# Altium PCB Stm32_design_Project.PcbDoc
Units mm, origin at the board's own origin, x right, y up, seen from the top; angles counter-clockwise.
Board outline 152.4 x 101.6 mm, 4 copper layers (L1 (Sig), L2 (GND), L3 (GND), L4 Sig), stack 1.57 mm thick; 84 components, 49 nets, 282 pads, 95 vias.
Unrouted connection lines stored in the file: 17.
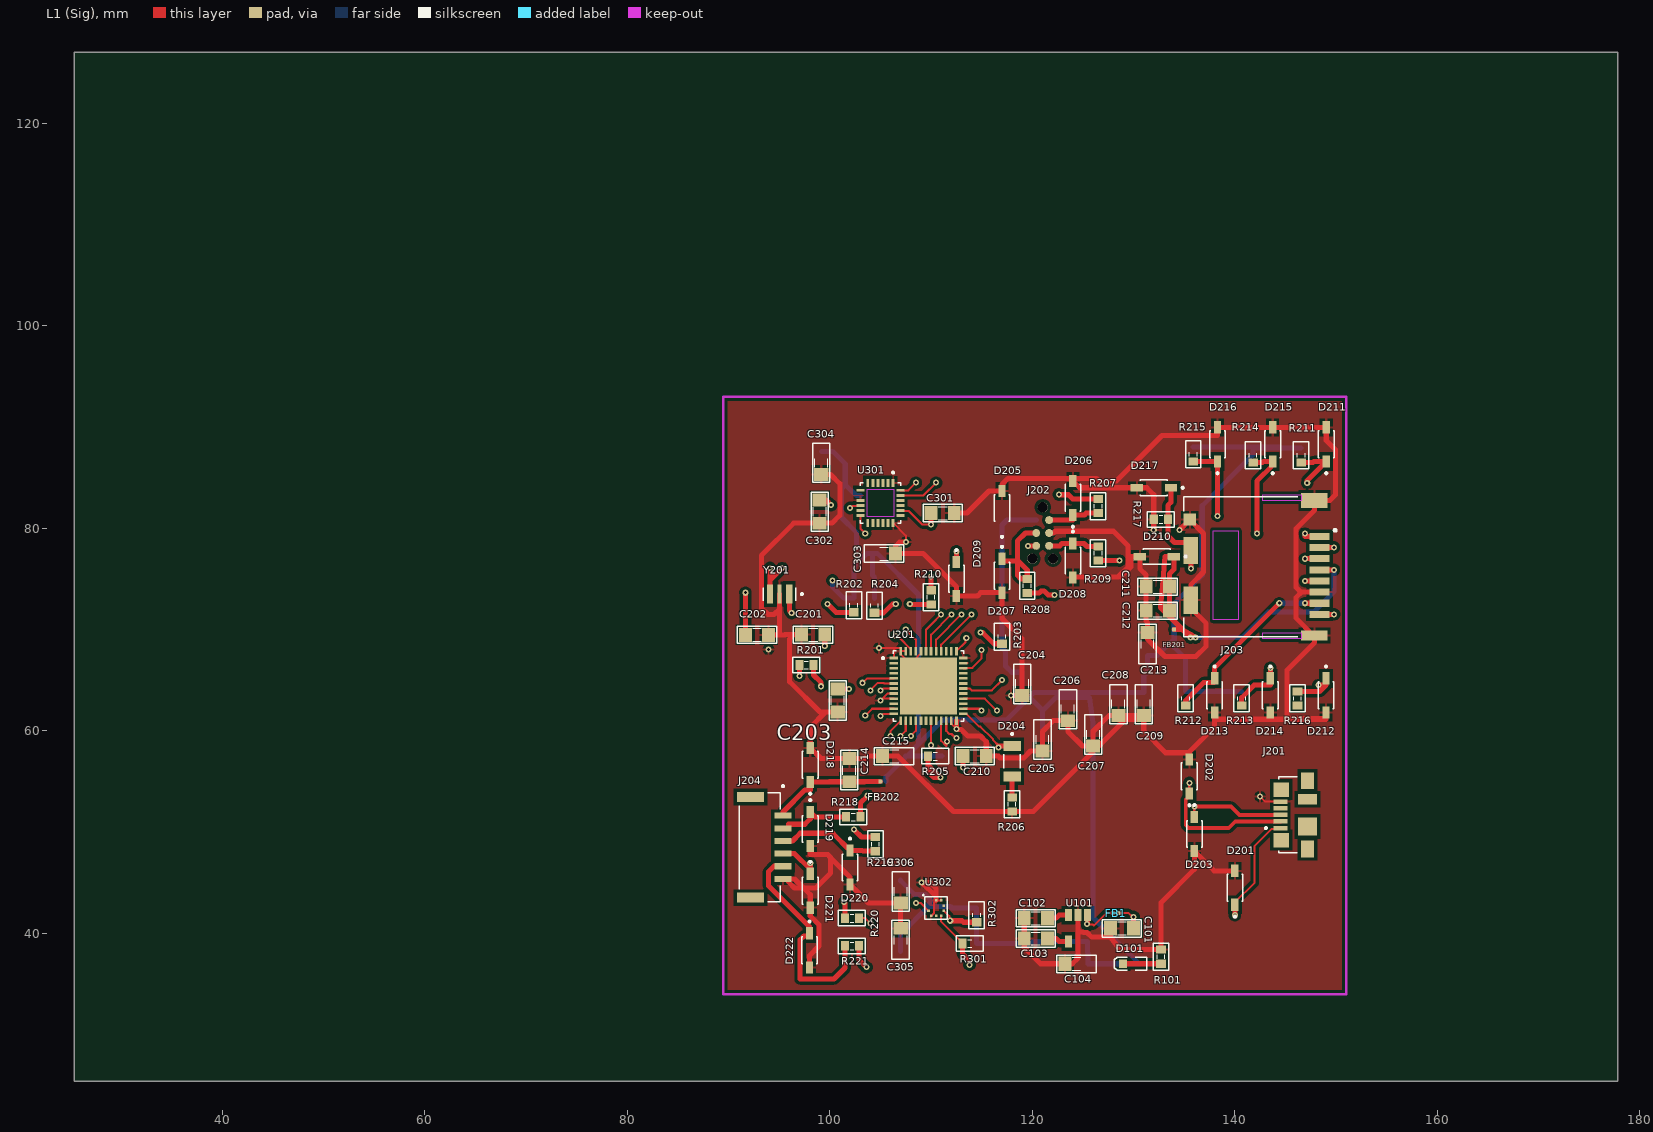
[diagram p0: L1 (Sig) view]
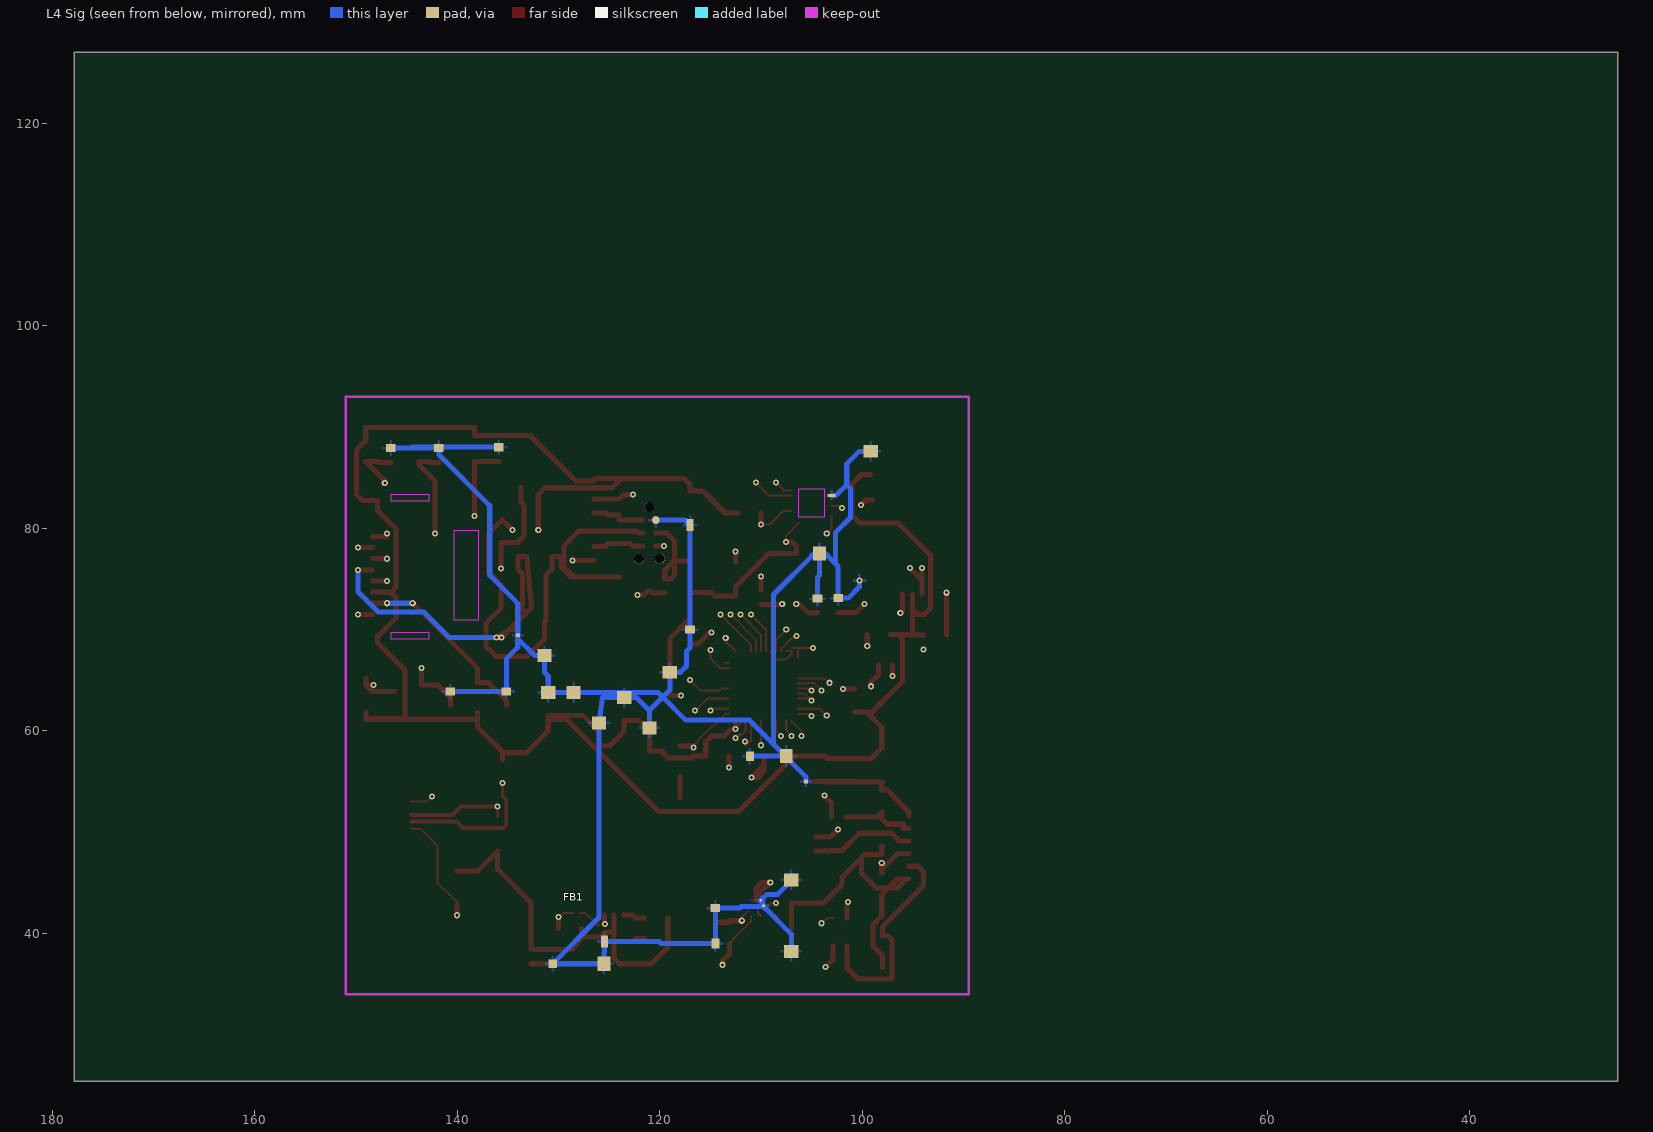
[diagram p1: L4 Sig view, seen from below]
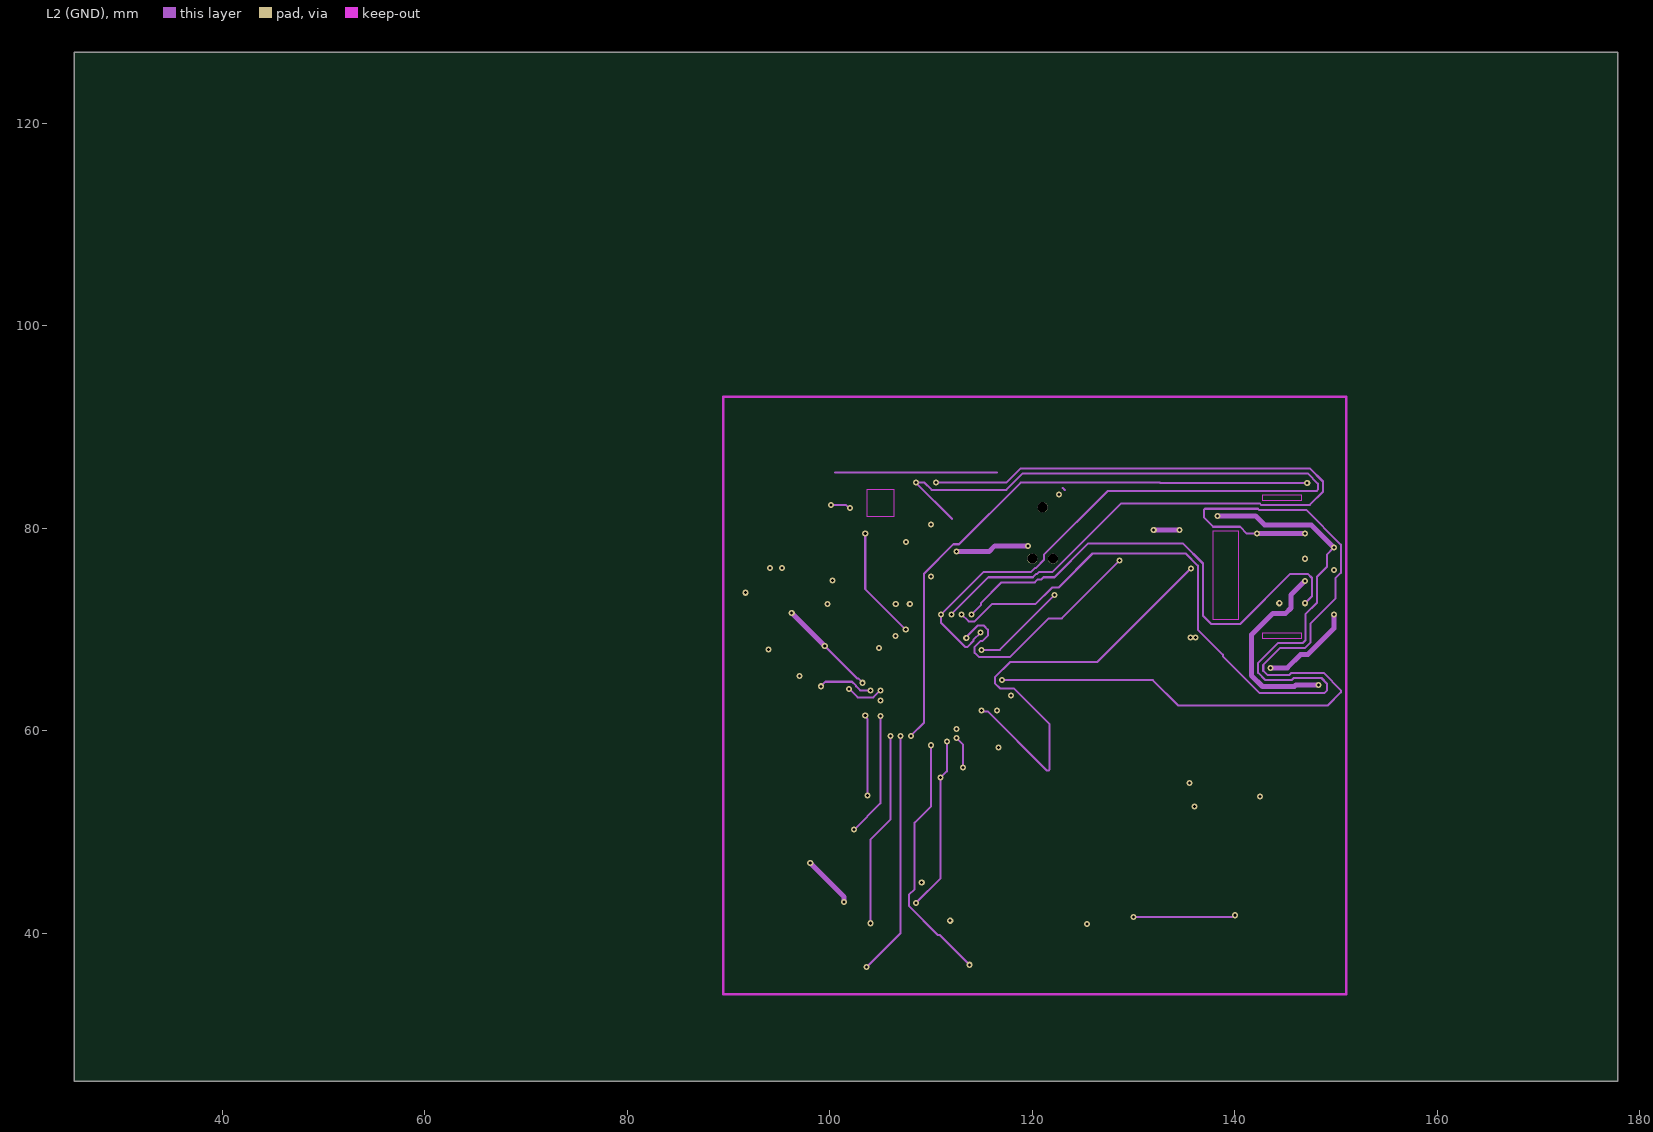
[diagram p2: L2 (GND)]
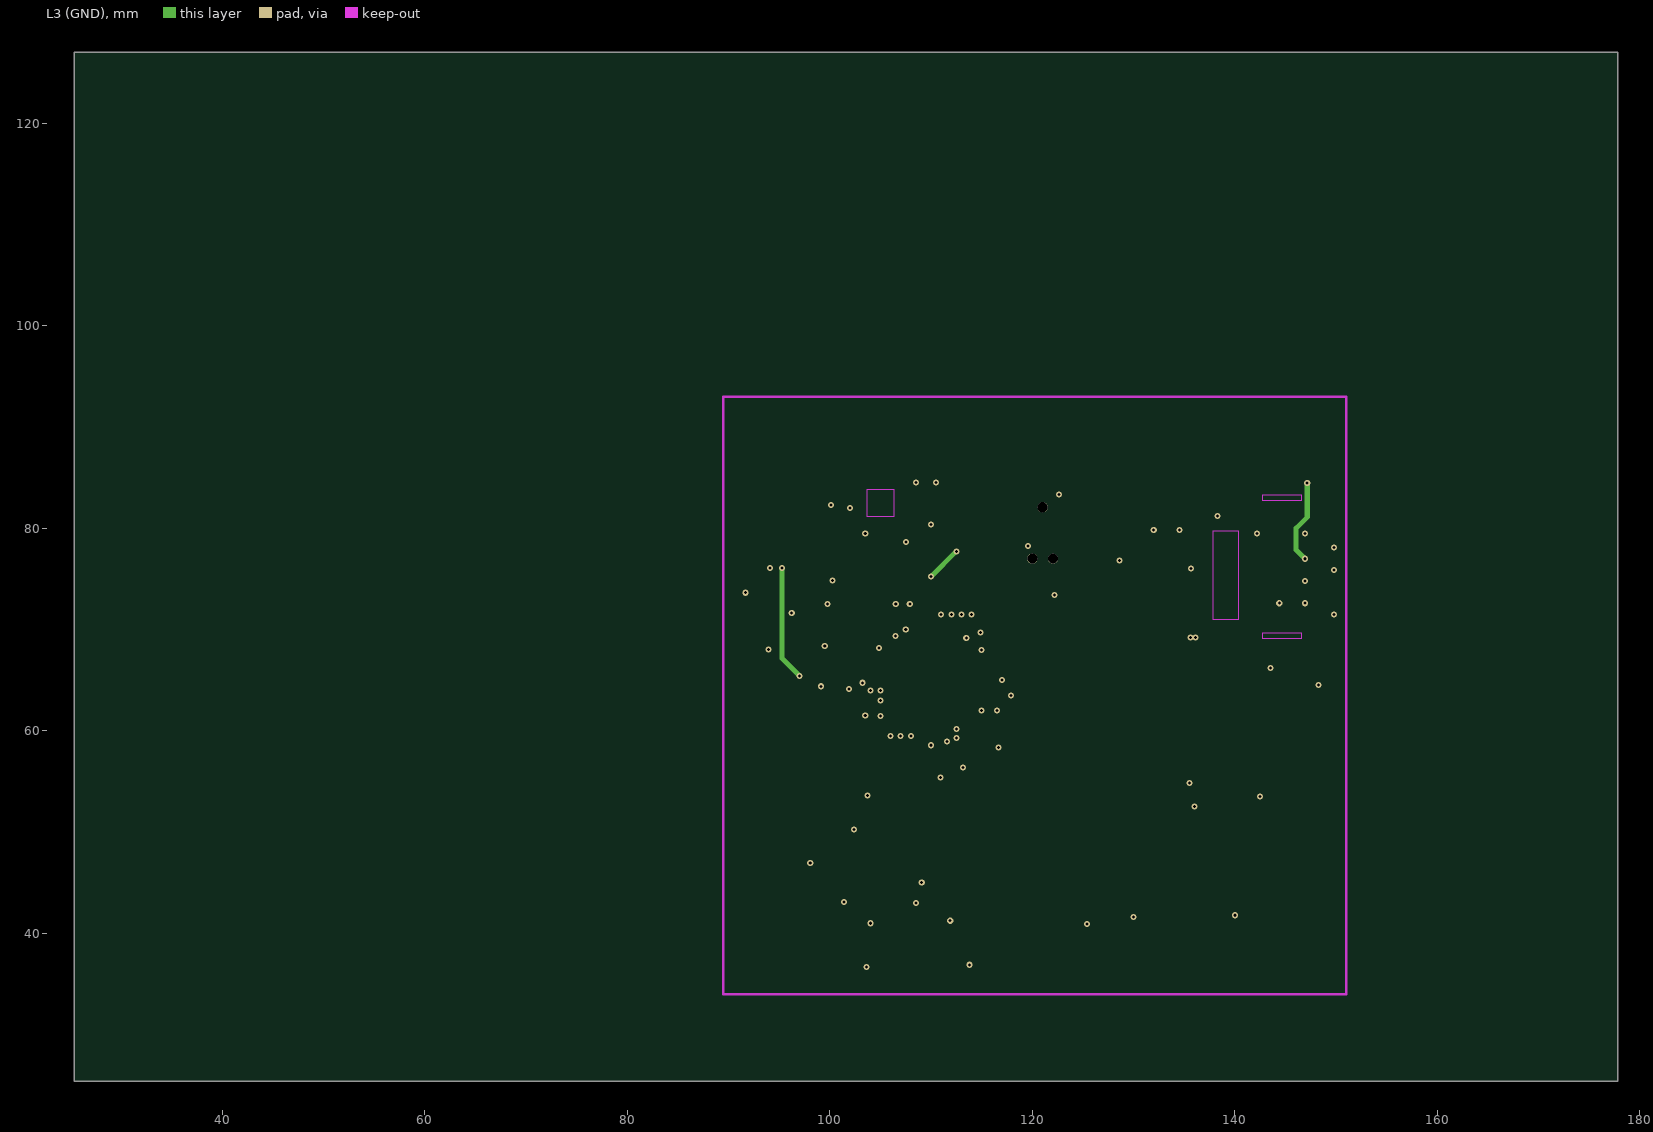
[diagram p3: L3 (GND)]
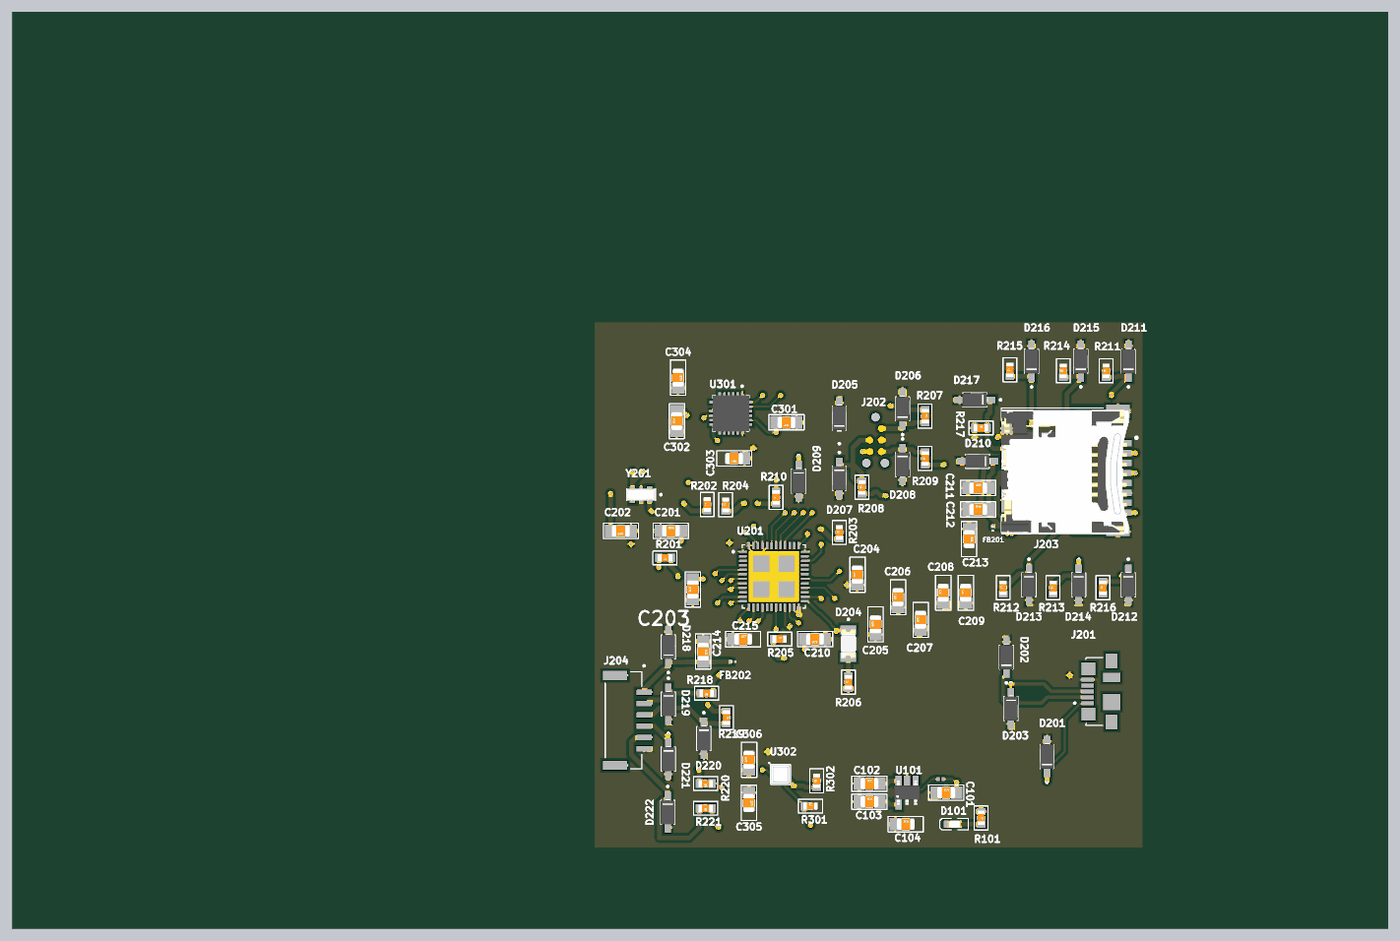
[diagram p4: 3D render of the assembled board from above, using the file's embedded part models]

## Layer stack, top to bottom
Top Solder: solder mask 0.0254, SM-001, Dk 4
L1 (Sig): signal copper 0.035
Dielectric 1: core 0.1, PP-017, Dk 4.6
L2 (GND): signal copper 0.0175
Dielectric 2: prepreg 1.265, Core-039, Dk 4.6
L3 (GND): signal copper 0.0175
Dielectric 3: core 0.1, PP-017, Dk 4.6
L4 Sig: signal copper 0.035
Bottom Solder: solder mask 0.0254, SM-001, Dk 4

## Board outline
25.4,25.4 177.8,25.4 177.8,127 25.4,127

## Design rules (kind name [scope] priority, off if disabled: settings)
Clearance [All] p1: gap=0.3 ignorepadtopadclearanceinfootprint=FALSE
DiffPairsRouting [All] p1: maxlimit=0.254 minlimit=0.254 mostfreqgap=0.254 toplayer_minwidth=0.381 toplayer_maxwidth=0.381 toplayer_prefwidth=0.381 midlayer1_minwidth=0.381 midlayer1_maxwidth=0.381 midlayer1_prefwidth=0.381 midlayer2_minwidth=0.381 midlayer2_maxwidth=0.381 midlayer2_prefwidth=0.381 bottomlayer_minwidth=0.381 bottomlayer_maxwidth=0.381 bottomlayer_prefwidth=0.381 maxuncoupledlength=12.7
PolygonConnect [All] p1: connectstyle=Relief reliefconductorwidth=0.254 reliefentries=4 polygonreliefangle="90 Angle" airgapwidth=0.254
RoutingTopology [All] p1: topology=Daisy_MidDriven
RoutingVias [All] p1: holewidth=0.3 width=0.6 viastyle="Through Hole" minholewidth=0.3 minwidth=0.6 maxholewidth=0.3 maxwidth=0.6
SilkToSolderMaskClearance [IsPad] p1: minsilkscreentomaskgap=0.1 clearancetoexposedcopper=TRUE
SolderMaskExpansion [All] p1: expansion=0.102 istentingtop=FALSE
Width [All] p1: maxlimit=1 minlimit=0.2 preferedwidth=0.5
27 further rules are at their usual default settings.

## Classes and differential pairs
component class Sensors: C301 C302 C303 C304 C305 C306 R301 R302 U301 U302
component class Power_supply: C101 C102 C103 C104 D101 FB1 R101 U101
component class MCU: C201 C202 C203 C204 C205 C206 C207 C208 C209 C210 C211 C212 C214 C215 D201 D202 D203 D204 D205 D206 D207 D208 D209 D210 D211 D212 D213 D214 D215 D216 D217 D218 D219 D220 D221 D222 FB201 FB202 J201 J202 J203 J204 R201 R202 R203 R204 R205 R206 R207 R208 R209 R210 R211 R212 R213 R214 R215 R216 R217 R218 R219 R220 R221 U201 Y201
differential pair MCU_USB_D: +MCU_USB_D_P -MCU_USB_D_N

## Components (designator, comment, footprint, x,y, rotation, side; value= is the part's Value field where it differs from the comment)
C101 "Cap Non-Pol SMD" CAP-SM-0805#1 127.7,40.5 r0 top value=2u2
C102 "Cap Non-Pol SMD" CAP-SM-0805#1 119.2,41.5 r0 top value=2u2
C103 "Cap Non-Pol SMD" CAP-SM-0805#1 119.2,39.5 r0 top value=470pF
C104 "Cap Non-Pol SMD" CAP-SM-0805#2 123.214,37 r0 top value=2u2
C201 "Cap Non-Pol SMD" CAP-SM-0805#1 97.214,69.5 r0 top value=10pF
C202 "Cap Non-Pol SMD" CAP-SM-0805#1 93.95,69.475 r180 top value=10pF
C203 "Cap Non-Pol SMD" CAP-SM-0805#1 100.779,61.859 r90 top value=100n
C204 "Cap Non-Pol SMD" CAP-SM-0805#2 119,63.5 r90 top value=2u2
C205 "Cap Non-Pol SMD" CAP-SM-0805#2 121,58 r90 top value=100n
C206 "Cap Non-Pol SMD" CAP-SM-0805#2 123.5,61 r90 top value=100n
C207 "Cap Non-Pol SMD" CAP-SM-0805#2 126,58.5 r90 top value=100n
C208 "Cap Non-Pol SMD" CAP-SM-0805#2 128.5,61.5 r90 top value=100n
C209 "Cap Non-Pol SMD" CAP-SM-0805#2 131,61.5 r90 top value=100n
C210 "Cap Non-Pol SMD" CAP-SM-0805#1 115.449,57.5 r180 top value=2u2
C211 "Cap Non-Pol SMD" CAP-SM-0805#1 131.241,74.243 r0 top value=100pF
C212 "Cap Non-Pol SMD" CAP-SM-0805#1 131.241,71.881 r0 top value=100pF
C213 "Cap Non-Pol SMD" CAP-SM-0805#2 131.377,69.719 r270 top value=100pF
C214 "Cap Non-Pol SMD" CAP-SM-0805#1 101.931,57.259 r270 top value=2u2
C215 "Cap Non-Pol SMD" CAP-SM-0805#2 105.214,57.5 r0 top value=2u2
C301 "Cap Non-Pol SMD" CAP-SM-0805#1 112.286,81.5 r180 top value=2n2
C302 "Cap Non-Pol SMD" CAP-SM-0805#1 99,80.5 r90 top value=100n
C303 "Cap Non-Pol SMD" CAP-SM-0805#2 106.5,77.5 r180 top value=10n
C304 "Cap Non-Pol SMD" CAP-SM-0805#3 99.16,87.601 r270 top value=100n
C305 "Cap Non-Pol SMD" CAP-SM-0805#2 107,40.5 r270 top value=100n
C306 "Cap Non-Pol SMD" CAP-SM-0805#2 107,43 r90 top value=100n
D101 "LED SMD" LED_0603_Blue 129.759,37 r180 top
D201 "BZT52C3V3-7-F" SOD3715X135N#1 140,44.5 r90 top
D202 "BZT52C3V3-7-F" SOD3715X135N#1 135.5,55.5 r90 top
D203 "BZT52C3V3-7-F" SOD3715X135N#1 136,49.82 r270 top
D204 "LHN974_RED_LED_1206" LEDC3216X120N 118,56.99 r270 top
D205 "BZT52C3V3-7-F" SOD3715X135N#2 117,82 r90 top
D206 "BZT52C3V3-7-F" SOD3715X135N#1 124,83 r90 top
D207 "BZT52C3V3-7-F" SOD3715X135N#1 117,75.32 r270 top
D208 "BZT52C3V3-7-F" SOD3715X135N#1 124,76.82 r270 top
D209 "BZT52C3V3-7-F" SOD3715X135N#1 112.5,75 r270 top
D210 "BZT52C3V3-7-F" SOD3715X135N#1 132.294,77.2 r180 top
D211 "BZT52C3V3-7-F" SOD3715X135N#1 149.021,88.284 r90 top
D212 "BZT52C3V3-7-F" SOD3715X135N#1 149,63.5 r270 top
D213 "BZT52C3V3-7-F" SOD3715X135N#1 138,63.5 r270 top
D214 "BZT52C3V3-7-F" SOD3715X135N#1 143.5,63.5 r270 top
D215 "BZT52C3V3-7-F" SOD3715X135N#1 143.736,88.284 r90 top
D216 "BZT52C3V3-7-F" SOD3715X135N#1 138.282,88.284 r90 top
D217 "BZT52C3V3-7-F" SOD3715X135N#1 132,84 r180 top
D218 "BZT52C3V3-7-F" SOD3715X135N#1 98.069,56.636 r90 top
D219 "BZT52C3V3-7-F" SOD3715X135N#1 98.07,50.304 r270 top
D220 "BZT52C3V3-7-F" SOD3715X135N#1 102,46.5 r270 top
D221 "BZT52C3V3-7-F" SOD3715X135N#1 98.07,44.216 r270 top
D222 "BZT52C3V3-7-F" SOD3715X135N#1 98,38.32 r270 top
FB1 "" BEADC0603X33N#1 128.219,42 r180 bottom
FB201 "" BEADC0603X33N#2 134,69.719 r270 top
FB202 "" BEADC0603X33N#2 105.281,55 r0 top
J201 "47346-0001" MOLEX_47346-0001 147.16,51.7 r90 top
J202 "TC2030-MCP-NL" TC2030-MCP-NL 121.655,80.81 r270 top
J203 "DM3CS-SF" HRS_DM3CS-SF 142,76 r90 top
J204 "SM06B-GHS-TB(LF)(SN)" JST_SM06B-GHS-TB(LF)(SN) 93.5,48.5 r270 top
R101 "RESISTOR SMD" RES-SM-0603#1 132.7,38.386 r270 top value=1K
R201 "RESISTOR SMD" RES-SM-0603#1 98.386,66.5 r180 top value=22R
R202 "RESISTOR SMD" RES-SM-0603#2 102.373,71.718 r90 top value=2K2
R203 "RESISTOR SMD" RES-SM-0603#2 117,68.614 r90 top value=2K2
R204 "RESISTOR SMD" RES-SM-0603#2 104.413,71.676 r90 top value=2K2
R205 "RESISTOR SMD" RES-SM-0603#2 109.71,57.5 r0 top value=2K2
R206 "RESISTOR SMD" RES-SM-0603#1 118,52.041 r90 top value=1K
R207 "RESISTOR SMD" RES-SM-0603#1 126.5,82.886 r270 top value=22R
R208 "RESISTOR SMD" RES-SM-0603#1 119.5,73.614 r90 top value=22R
R209 "RESISTOR SMD" RES-SM-0603#1 126.5,76.82 r90 top value=22R
R210 "RESISTOR SMD" RES-SM-0603#1 110,72.5 r90 top value=22R
R211 "RESISTOR SMD" RES-SM-0603#2 146.545,86.529 r90 top
R212 "RESISTOR SMD" RES-SM-0603#2 135.14,62.497 r90 top
R213 "RESISTOR SMD" RES-SM-0603#2 140.671,62.5 r90 top
R214 "RESISTOR SMD" RES-SM-0603#2 141.799,86.529 r90 top
R215 "RESISTOR SMD" RES-SM-0603#2 135.89,86.62 r90 top
R216 "RESISTOR SMD" RES-SM-0603#1 146.183,62.497 r90 top
R217 "RESISTOR SMD" RES-SM-0603#1 132,80.884 r0 top value=1M
R218 "RESISTOR SMD" RES-SM-0603#1 103,51.5 r180 top value=22R
R219 "RESISTOR SMD" RES-SM-0603#1 104.5,49.5 r270 top value=22R
R220 "RESISTOR SMD" RES-SM-0603#1 102.886,41.5 r180 top value=22R
R221 "RESISTOR SMD" RES-SM-0603#1 102.886,38.762 r180 top value=22R
R301 "RESISTOR SMD" RES-SM-0603#2 113.114,39 r0 top value=10K
R302 "RESISTOR SMD" RES-SM-0603#2 114.5,41.114 r90 top value=10K
U101 "PMIC-MIC5205-3.3YMSTR(SOT23-5)" SOT-23-5 124.5,40.5 r180 top
U201 "STM32F411CEU6" QFN50P700X700X60-49N 109.75,64.43 r0 top
U301 "MPU-6050" QFN50P400X400X95-24N 105,82.5 r270 top
U302 "BMP581" BMP581 110.5,42.5 r90 top
Y201 "CSTCE16M0V53-R0" OSC_CSTCE16M0V53-R0 95.05,73.5 r180 top

## Footprints (in the part's own frame and the unit in brackets; to place one, negate y for a bottom-side part, rotate by r counter-clockwise, add the part's x,y. Pads: shape width x height; smd on the part's side, far side on the other; paste and mask are expansions set on the pad)
BEADC0603X33N#1 [mm]
  rect 0.38x0.4 smd far side: 1(-0.281,0) 2(0.281,0)
  body extent -0.3,-0.15 0.3,0.15, height 0.33
BEADC0603X33N#2 [mm]
  rect 0.38x0.4 smd: 1(-0.281,0)
  rect 0.38x0.4 smd far side: 2(0.281,0)
  body extent -0.3,-0.15 0.3,0.15, height 0.33
BMP581 [mm]
  rect 0.25x0.275 smd far side paste-1: 1(0.25,0.763)
  rect 0.25x0.275 smd paste-1: 2(-0.25,0.763) 6(-0.25,-0.763) 7(0.25,-0.763)
  rect 0.275x0.25 smd paste-0.025: 3(-0.763,0.5) 4(-0.763,0) 5(-0.763,-0.5) 8(0.763,-0.5) 9(0.763,0)
  rect 0.275x0.25 smd far side paste-0.025: 10(0.763,0.5)
  silkscreen extent -1.1,-1.1 1.33,1.3, body extent -1,-1 1,1, height 0.8
CAP-SM-0805#1 [mil]
  rect 50x55 smd: 1(0,0) 2(90,0)
  silkscreen extent -32,-34 121,33, body extent 6,-25 84,25, height 31
CAP-SM-0805#2 [mil]
  rect 50x55 smd: 1(0,0)
  rect 50x55 smd far side: 2(90,0)
  silkscreen extent -32,-34 121,33, body extent 6,-25 84,25, height 31
CAP-SM-0805#3 [mil]
  rect 50x55 smd far side: 1(0,0)
  rect 50x55 smd: 2(90,0)
  silkscreen extent -32,-34 121,33, body extent 6,-25 84,25, height 31
HRS_DM3CS-SF [mm]
  rect 0.7x2 smd: 1(3.2,-6.35) 2(2.1,-6.35) 3(1,-6.35) 4(-0.1,-6.35) 5(-1.2,-6.35) 6(-2.3,-6.35) 7(-3.4,-6.35) 8(-4.5,-6.35)
  rect 2.7x1.4 smd: 9(1.8,6.35) S3(-3.1,6.35)
  rect 1x2.6 smd: S1(-6.6,-5.85)
  rect 1.5x2.6 smd: S2(6.75,-5.85)
  rect 1.2x1.2 smd: S5(4.85,6.45)
  Keep-Out Layer region: 7.3,-4.556 6.709,-4.556 6.709,-0.75 7.3,-0.75
  Keep-Out Layer region: -6.3,-4.558 -6.912,-4.558 -6.912,-0.75 -6.3,-0.75
  Keep-Out Layer region: 3.75,1.651 -5.053,1.651 -5.053,4.15 3.75,4.15
  silkscreen extent -6.7,-8.02 7.1,7.05, body extent -6.9,-7.05 6.9,7.05, height 2.13
JST_SM06B-GHS-TB(LF)(SN) [mm]
  rect 0.6x1.7 smd: 1(-3.125,1.875) 2(-1.875,1.875) 3(-0.625,1.875) 4(0.625,1.875) 5(1.875,1.875) 6(3.125,1.875)
  rect 1x2.7 smd: S1(-4.975,-1.325) S2(4.975,-1.325)
  silkscreen extent -6.13,-2.42 5.38,1.97, body extent -5.38,-2.05 5.38,2.8
LED_0603_Blue [mm] "Chip LED, 2-Leads, Body 1.6x0.8mm, IPC Medium Density"
  rect 0.8x0.8 smd far side: 1(-0.8,0)
  rect 0.8x0.8 smd: 2(0.8,0)
  silkscreen extent -1.52,-0.63 1.65,0.64, body extent -0.8,-0.4 0.8,0.4, height 0.7
LEDC3216X120N [mm]
  rect 1.01x1.73 smd: NEG(1.51,0) POS(-1.51,0)
  silkscreen extent -2.8,-0.8 0.69,0.8, body extent -1.6,-0.8 1.6,0.8, height 1.2
MOLEX_47346-0001 [mm]
  rect 0.45x1.38 smd: 1(-1.3,2.66) 2(-0.65,2.66) 3(0,2.66) 4(0.65,2.66) 5(1.3,2.66)
  rect 1.425x1.55 smd: S1(-2.487,2.575) S2(2.487,2.575)
  rect 1.65x1.3 smd: S3(-3.375,0) S6(3.375,0)
  rect 1.8x1.9 smd: S4(-1.15,0)
  rect 1x1.9 smd: S5(1.55,0)
  silkscreen extent -3.75,1 3.75,4.2
OSC_CSTCE16M0V53-R0 [mm]
  rect 0.6x1.9 smd: 1(-0.95,0) 3(0.95,0)
  rect 0.4x1.9 smd: 2(0,0)
  silkscreen extent -2.3,-0.65 1.6,0.65, body extent -1.6,-0.65 1.6,0.65, height 1
QFN50P400X400X95-24N [mm]
  rect 0.79x0.28 smd: 1(-1.97,1.25) 2(-1.97,0.75) 3(-1.97,0.25) 4(-1.97,-0.25) 5(-1.97,-0.75) 6(-1.97,-1.25) 13(1.97,-1.25) 14(1.97,-0.75) 15(1.97,-0.25) 16(1.97,0.25) 17(1.97,0.75) 18(1.97,1.25)
  rect 0.28x0.79 smd: 7(-1.25,-1.97) 9(-0.25,-1.97) 10(0.25,-1.97) 11(0.75,-1.97) 12(1.25,-1.97) 19(1.25,1.97) 20(0.75,1.97) 21(0.25,1.97) 22(-0.25,1.97) 23(-0.75,1.97) 24(-1.25,1.97)
  rect 0.28x0.79 smd far side: 8(-0.75,-1.97)
  Keep-Out Layer region: 1.35,-1.3 -1.35,-1.3 -1.35,1.3 1.35,1.3
  silkscreen extent -3.1,-2 2,2, body extent -2,-2 2,2, height 0.93
QFN50P700X700X60-49N [mm]
  rrect25% 0.87x0.27 smd: 1(-3.43,2.75) 2(-3.43,2.25) 3(-3.43,1.75) 4(-3.43,1.25) 5(-3.43,0.75) 6(-3.43,0.25) 7(-3.43,-0.25) 8(-3.43,-0.75) 9(-3.43,-1.25) 10(-3.43,-1.75) 11(-3.43,-2.25) 12(-3.43,-2.75) 25(3.43,-2.75) 26(3.43,-2.25) 27(3.43,-1.75) 28(3.43,-1.25) 29(3.43,-0.75) 30(3.43,-0.25) 31(3.43,0.25) 32(3.43,0.75) 33(3.43,1.25) 34(3.43,1.75) 35(3.43,2.25) 36(3.43,2.75)
  rrect25% 0.27x0.87 smd: 13(-2.75,-3.43) 14(-2.25,-3.43) 15(-1.75,-3.43) 16(-1.25,-3.43) 17(-0.75,-3.43) 18(-0.25,-3.43) 19(0.25,-3.43) 20(0.75,-3.43) 21(1.25,-3.43) 22(1.75,-3.43) 23(2.25,-3.43) 24(2.75,-3.43) 37(2.75,3.43) 38(2.25,3.43) 39(1.75,3.43) 40(1.25,3.43) 41(0.75,3.43) 42(0.25,3.43) 43(-0.25,3.43) 44(-0.75,3.43) 45(-1.25,3.43) 46(-1.75,3.43) 47(-2.25,3.43) 48(-2.75,3.43)
  rect 5.6x5.6 smd paste-4: 49(0,0)
  silkscreen extent -4.6,-3.5 3.5,3.5
RES-SM-0603#1 [mm]
  rect 0.8x0.95 smd: 1(-0.014,0) 2(1.386,0)
  silkscreen extent -0.64,-0.76 2.03,0.76, body extent -0.11,-0.4 1.49,0.4, height 0.3
RES-SM-0603#2 [mm]
  rect 0.8x0.95 smd: 1(-0.014,0)
  rect 0.8x0.95 smd far side: 2(1.386,0)
  silkscreen extent -0.63,-0.76 2.03,0.76, body extent -0.11,-0.4 1.49,0.4, height 0.3
SOD3715X135N#1 [mm]
  rect 1.21x0.73 smd: A(1.68,0) K(-1.68,0)
  silkscreen extent -2.95,-0.77 1.33,0.78, body extent -1.83,-0.77 1.83,0.77, height 0.74
SOD3715X135N#2 [mm]
  rect 1.21x0.73 smd: A(1.68,0)
  rect 1.21x0.73 smd far side: K(-1.68,0)
  silkscreen extent -2.95,-0.77 1.33,0.77, body extent -1.83,-0.77 1.83,0.77, height 0.74
SOT-23-5 [mm]
  rect 0.69x1.2 smd: 1(-0.95,-1.3) 2(0,-1.3) 3(0.95,-1.3) 4(0.95,1.3)
  rect 0.69x1.2 smd far side: 5(-0.95,1.3)
  body extent -1.45,-1.35 1.45,1.35, height 1.45
TC2030-MCP-NL [mm]
  round 0.78 smd paste-1: 1(0,0) 3(1.27,0) 4(1.27,-1.27) 5(2.54,0) 6(2.54,-1.27)
  round 0.78 smd far side paste-1: 2(0,-1.27)
  round 1 hole 1 unplated: ""(-1.27,-0.635) ""(3.81,-1.655) ""(3.81,0.385)

## Part data
C101 C102 C103 C104 C201 C202 C203 C204 C205 C206 C207 C208 C209 C210 C211 C212 C213 C214 C215 C301 C302 C303 C304 C305 C306: "Capacitor"
D101: "LED"
D201 D202 D203 D205 D206 D207 D208 D209 D210 D211 D212 D213 D214 D215 D216 D217 D218 D219 D220 D221 D222: "Diode Zener 3.3V 6% 500mW 2Pin SOD123", Package="SOD-123 Fairchild Semiconductor", Check_prices=https://www.snapeda.com/parts/BZT52C3V3-7-F/Diodes+Inc./view-part/?ref=eda, MF="Diodes Inc.", MP=BZT52C3V3-7-F, SnapEDA_Link=https://www.snapeda.com/parts/BZT52C3V3-7-F/Diodes+Inc./view-part/?ref=snap
D204: "2.6 V Red LED SMD", Package=None, Check_prices=https://www.snapeda.com/parts/LHN974%20RED%20LED%201206/Osram/view-part/?ref=eda, MF=Osram, MP="LHN974 RED LED 1206", SnapEDA_Link=https://www.snapeda.com/parts/LHN974%20RED%20LED%201206/Osram/view-part/?ref=snap
FB1 FB201 FB202: library part BLM03HD331SZ1D, "Ferrite Bead", Package="0603 Murata", Check_prices=https://www.snapeda.com/parts/BLM03HD331SZ1D/Murata/view-part/?ref=eda, MF=Murata, MP=BLM03HD331SZ1D, SnapEDA_Link=https://www.snapeda.com/parts/BLM03HD331SZ1D/Murata/view-part/?ref=snap
J201: "Conn Data USB Micro B w/Flange SMT Bottom Mnt LF", Package=None, Check_prices=https://www.snapeda.com/parts/47346-0001/Molex/view-part/?ref=eda, MF=Molex, MP=47346-0001, SnapEDA_Link=https://www.snapeda.com/parts/47346-0001/Molex/view-part/?ref=snap
J202: "MPLABÂ® REAL ICE, ICD 3, PICkit 3, PICkit 2 Plug-Of-Nailsâ„¢ Adapter Cable", Package=None, Check_prices=https://www.snapeda.com/parts/TC2030-MCP-NL/Tag-Connect/view-part/?ref=eda, MF="Tag-Connect LLC", MP=TC2030-MCP-NL, SnapEDA_Link=https://www.snapeda.com/parts/TC2030-MCP-NL/Tag-Connect/view-part/?ref=snap
J203: "10 (8 + 2) Position Card Connector Secure Digital - microSDâ„¢ Surface Mount, Right Angle Gold", Package=None, Check_prices=https://www.snapeda.com/parts/DM3CS-SF/Hirose+Electric+Co+Ltd/view-part/?ref=eda, MF="Hirose Electric Co Ltd", MP=DM3CS-SF, SnapEDA_Link=https://www.snapeda.com/parts/DM3CS-SF/Hirose+Electric+Co+Ltd/view-part/?ref=snap
J204: "Connector Header Surface Mount, Right Angle 6 position 0.049 (1.25mm)", Package=None, Check_prices=https://www.snapeda.com/parts/SM06B-GHS-TB(LF)(SN)-/JST/view-part/?ref=eda, MF="JST Sales", MP=SM06B-GHS-TB(LF)(SN)-, SnapEDA_Link=https://www.snapeda.com/parts/SM06B-GHS-TB(LF)(SN)-/JST/view-part/?ref=snap
R101 R201 R202 R203 R204 R205 R206 R207 R208 R209 R210 R211 R212 R213 R214 R215 R216 R217 R218 R219 R220 R221 R301 R302: "Resistor"
  R211 R212 R213 R214 R215: 10K=1K
  R216: R216=22R
U101: "Linear Voltage Regulator IC Positive Fixed 1 Output 150mA SOT-23-5", Package="SOT-23-5 Microchip", Check_prices=https://www.snapeda.com/parts/MIC5205-3.3YM5-TR/Microchip/view-part/?ref=eda, MF=Microchip, MP=MIC5205-3.3YM5-TR, SnapEDA_Link=https://www.snapeda.com/parts/MIC5205-3.3YM5-TR/Microchip/view-part/?ref=snap
U201: "High-performance access line, ARM Cortex-M4 core with DSP and FPU, 512 Kbytes Flash, 100 MHz CPU, ART Accelerator", Package=None, Availability=Unavailable, MP=STM32F411CEU6, Price=None
U301: "MPU-6050 series Accelerometer, Gyroscope, 3 Axis Sensor Evaluation Board", Package="QFN-24 InvenSense", Check_prices=https://www.snapeda.com/parts/MPU-6050/TDK+InvenSense/view-part/?ref=eda, MF="TDK InvenSense", MP=MPU-6050, SnapEDA_Link=https://www.snapeda.com/parts/MPU-6050/TDK+InvenSense/view-part/?ref=snap
U302: "Very small, low-power and low noise 24-bit absolute barometric pressure sensor. This digital, high-performance sensor is ideally suited for a wide range of altitude tracking applications and offers outstanding design flexibility", Package=None, Availability=Unavailable, Check_prices=https://www.snapeda.com/parts/BMP581/Bosch/view-part/?ref=eda, MF=Bosch, MP=BMP581, Price=None, SnapEDA_Link=https://www.snapeda.com/parts/BMP581/Bosch/view-part/?ref=snap
Y201: "16 MHz Ceramic Resonator Built in Capacitor 15 pF Â±0.3% -20Â°C ~ 80Â°C Surface Mount", Package=None, Check_prices=https://www.snapeda.com/parts/CSTCE16M0V53-R0-/Murata/view-part/?ref=eda, MF=Murata, MP=CSTCE16M0V53-R0-, SnapEDA_Link=https://www.snapeda.com/parts/CSTCE16M0V53-R0-/Murata/view-part/?ref=snap

## Via types
v1: diameter 0.6, hole 0.3, L1 (Sig) to L4 Sig, 95 vias

## Nets (pads, with @x,y where several pads share a name; then routed paths per layer and width w, separated by ;. In a path a pad name is that pad's centre, name@x,y a point inside that pad or via, vN(x,y) a via of type N, cw(c..) or ccw(c..) an arc to the next point about the centre after c; other vN are vias at no path point)
+3V3: C104.2 C204.2 C205.2 C206.2 C207.2 C208.2 C209.2 C213.2 C215.2 C303.2 C304.1 C305.2 C306.2 D101.1 D205.K FB201.2 FB202.2 J202.2 R202.2 R203.2 R204.2 R205.2 R211.2 R212.2 R213.2 R214.2 R215.2 R301.2 R302.2 U101.5 U301.8 U301.13 U302.1 U302.10 | length 233.6
  L4 Sig w0.5: C304.1 100.283,87.601 101.524,86.36 101.524,84.29 ; v1(100.272,74.843) 100.272,74.216 101.384,73.104 R202.2 102.373,76.236 102.616,76.479 ; U301.8 102.616,83.25 101.524,84.29 ; C303.2 C303.2@104.214,77.495 ; R204.2 104.413,75.159 104.214,75.357 C303.2@104.214,77.495 ; FB202.2 105.562,55.473 C215.2@107.589,57.5 ; C305.2 107,39.919 109.731,42.65 111.928,42.65 112.078,42.5 R302.2 R301.2 119.863,39 120.062,39.2 U101.5 125.45,38.125 125.5,38.075 C104.2 D101.1 126,41.559 C207.2 125.639,63.286 C206.2 122.31,63.286 121,61.976 ; C306.2 107,45.187 108.337,43.85 109.413,43.85 U302.10 ; C215.2 C215.2@107.589,57.5 ; U302.1 109.737,42.85 110,43.112 U302.10@110,43.256 ; R205.2 C215.2@107.589,57.5 ; J202.2 117.49,80.81 D205.K R203.2 117,68.202 117.35,67.852 117.35,66.394 117.958,65.786 C204.2 119,64.027 119.695,63.332 ; C205.2 121,61.976 ; FB201.2 134,69.088 ; R215.2 144.455,88.006 144.546,87.915 ; R213.2 137.9,63.886 137.897,63.883 R212.2 135.14,67.109 134.01,68.239 ; R211.2 144.546,87.915 ; 101.524,84.29 101.15,83.916 101.15,81.07 102.616,79.604 102.616,76.479 ; 102.616,76.479 103.632,77.495 C303.2@104.214,77.495 ; C303.2@104.214,77.495 104.724,77.495 108.763,73.457 108.763,58.674 ; C215.2@107.589,57.5 108.763,58.674 ; 108.763,58.674 111.137,61.049 117.411,61.049 119.695,63.332 ; 119.695,63.332 121,62.027 121,61.976 ; 119.695,63.332 120.149,63.786 C208.2 C209.2 131,65.405 131.377,65.782 C213.2 132.345,67.433 134,69.088 ; 134,69.088 134,68.25 134.01,68.239 ; 134.01,68.239 134.01,72.593 136.779,75.362 136.779,82.229 141.799,87.249 R214.2 144.546,87.915
"+3V3 SD": C211.2 C212.2 D210.K FB201.1 J203.4 | length 37.6
  L1 (Sig) w0.5: C212.2 C211.2 133.527,75.489 133.974,75.937 D210.K 133.096,77.2 132.832,74.307 132.639,72.187 134.826,70 ; FB201.1 134.826,70 ; v1(135.611,69.215) 134.826,70 ; v1(136.119,69.215) 135.747,69.44 134.826,70 ; J203.4 148.352,75.898 149.771,75.898 v1(149.773,75.895)
  L4 Sig w0.5: v1(135.611,69.215) v1(136.119,69.215) 140.767,69.215 143.281,71.73 147.777,71.73 149.784,73.736 149.784,75.884 v1(149.773,75.895)
+3V3_CONN: C214.2 D218.K FB202.1 J204.1 | length 11.7
  L1 (Sig) w0.5: J204.1 95.375,51.992 97.561,54.178 98.069,54.178 D218.K 99.974,54.956 99.991,54.973 C214.2 103.429,54.973 103.456,55 FB202.1
+5V: C102.2 FB1.2 U101.1 U101.3 | length 6.2
  L1 (Sig) w0.2: v1(125.415,40.943) 125.491,40.866 125.981,40.866 126.074,40.773 127.301,42 FB1.2
  L1 (Sig) w0.5: C102.2 122.352,41.5 122.652,41.8 U101.3 ; v1(125.415,40.943) 125.432,40.96 125.432,41.782 U101.1
"+5V USB": C101.2 D201.K FB1.1 J201.1 | length 23.8
  L1 (Sig) w0.2: FB1.1 129.512,42 129.886,41.626 v1(129.986,41.626) ; D201.K 140,43.06 141.955,45.015 141.955,48.635 143.644,50.325 144.425,50.325 J201.1
  L1 (Sig) w0.5: C101.2 v1(129.986,41.626) ; v1(140,41.788) D201.K
  L2 (GND) w0.2: v1(129.986,41.626) 139.729,41.626 139.892,41.788 v1(140,41.788)
BAR_CSB: R302.1 U302.6 | length 3.9
  L1 (Sig) w0.2: U302.6 111.814,41.698 111.814,41.326 v1(111.891,41.25)
  L1 (Sig) w0.5: v1(111.891,41.25) 113.075,41.25 113.224,41.1 R302.1
BAR_INT: R301.1 U201.19 U302.5 U302.7 | length 33.6
  L1 (Sig) w0.2: v1(110,58.575) U201.19 ; U302.5 111,41.15 112.775,39.375 112.8,39.375 113.1,39.075 R301.1
  L1 (Sig) w0.5: R301.1 113.1,37.996 113.792,37.304 v1(113.792,36.899)
  L2 (GND) w0.2: v1(110,58.575) 110,52.545 108.378,50.922 108.378,44.378 107.8,43.8 107.8,42.71 110.667,39.843 110.848,39.843 v1(113.792,36.899)
"CONN GPIO1": D219.K J204.2 R218.2 | length 7.7
  L1 (Sig) w0.5: J204.2 95.936,50.375 95.936,50.775 97.536,50.775 98.07,51.308 D219.K 98.554,51.5 R218.2
"CONN GPIO2": D220.K J204.3 R219.2 | length 10.2
  L1 (Sig) w0.5: J204.3 96.318,49.125 97.079,49.886 100.294,49.886 D220.K 103.2,48.18 103.266,48.114 R219.2
"CONN GPIO3": D221.K J204.4 R220.2 | length 11.2
  L1 (Sig) w0.5: J204.4 96.524,47.875 D221.K@98.07,46.33 ; D221.K D221.K@98.07,46.33 ; v1(98.069,46.939) D221.K@98.07,46.33 ; v1(101.422,43.08) 101.5,43.002 R220.2
  L2 (GND) w0.5: v1(98.069,46.939) 101.422,43.586 v1(101.422,43.08)
"CONN GPIO4": D222.K J204.5 R221.2 | length 21.7
  L1 (Sig) w0.5: J204.5 94.488,46.625 93.955,46.092 93.955,44.704 98,40.659 D222.K 98,39.751 97.46,39.751 97.079,39.37 97.079,35.484 100.408,35.484 101.5,36.576 R221.2
GND: C101.1 C102.1 C103.1 C104.1 C201.1 C202.1 C203.1 C204.1 C205.1 C206.1 C207.1 C208.1 C209.1 C210.1 C211.1 C212.1 C213.1 C214.1 C215.1 C301.1 C302.1 C303.1 C304.2 C305.1 C306.1 D201.A D202.A D203.A D205.A D206.A D207.A D208.A D209.A D210.A D211.A D212.A D213.A D214.A D215.A D216.A D217.A D218.A D219.A D220.A D221.A D222.A J201.5 J202.3 J203.6 J203.S1 J203.S2 J203.S3 J203.S5 J204.6 R101.1 R206.1 R217.1 U101.2 U201.1 U201.8 U201.9 U201.23 U201.24 U201.35 U201.36 U201.44 U201.47 U201.48 U201.49 U301.1 U301.9 U301.11 U301.18 U302.3 U302.8 U302.9 Y201.2 | length 404.2
  L1 (Sig) w0.2: v1(104.839,68.161) 106.32,68.161 ; v1(105,63) v1@105.18,63.18 ; U301.18 107.516,79.264 v1(107.516,78.625) ; U201.9 v1@105.18,63.18 ; U201.8 105.68,63.68 v1@105.18,63.18 ; U201.1 106.32,68.161 ; U201.48@106.965,68.161 106.32,68.161 ; U201.47 U201.48 107,67.56 107.535,67.025 108.372,67.025 109,67.653 U201.44 ; U302.3@109.988,41.725 U302.3 110.013,41.725 110.041,41.725 110.275,41.959 110.275,43.025 110.5,43.25 U302.9 U302.8 ; U201.23 112.035,60.965 112.035,60.665 v1@112.5,60.2 ; U201.35 113.48,66.68 113.515,66.715 U201.35@113.577,66.715 ; v1(142.5,53.5) 143,53 J201.5
  L1 (Sig) w0.5: C202.1 94.742,69.475 ; Y201.2 95.05,72.048 ; J204.6 J204.6@95.936,45.375 ; C201.1 96.449,69.5 ; D222.A 98,37.802 98.944,38.746 98.944,40.857 98.07,41.732 D221.A 98.07,43.826 97.42,44.475 ; D219.A 98.07,47.803 99.739,47.803 ; C304.2 100.076,85.315 100.99,84.4 100.99,81.28 100.21,80.5 C302.1 96.439,80.5 93.243,77.304 93.243,72.136 93.894,71.486 94.488,71.486 95.05,72.048 ; C203.1 99.568,61.859 ; C305.1 C306.1 103.82,43 D220.A 102,45.542 100.076,47.466 ; v1(107.516,78.625) 106.894,78.625 106.5,78.232 C303.1 109.22,77.5 112.5,74.22 D209.A 114.579,73.32 114.899,73.64 D207.A 117,71.095 119,69.095 C204.1 v1(117.874,63.5) ; U302.9 110.5,43.604 ; C301.1 113.538,81.5 115.718,83.68 D205.A 117,84.328 117.584,84.912 126.34,84.912 126.594,84.658 128.295,84.658 132.796,89.159 138.282,89.159 D216.A D215.A D211.A 149.021,88.673 149.936,87.757 149.936,83.312 149.374,82.75 J203.S2 147.85,81.785 146.05,79.985 146.05,74.157 146.507,73.7 146.573,73.7 ; v1@112.5,60.2 v1@112.5,60.271 ; U201.24 v1@112.5,60.271 ; C102.1 C103.1 119.2,38.608 120.808,37 C104.1 123.952,37 124.5,37.548 124.5,40.132 ; J202.3 122.098,79.54 122.263,79.705 128.016,79.705 129.464,78.257 129.464,76.2 128.448,75.184 124,75.184 D208.A ; D206.A 124.68,84 D217.A 131.298,84 131.986,83.312 R217.1 v1(131.986,79.832) ; U101.2 124.5,40.132 ; C101.1 127.7,39.624 ; 128.727,75.184 129.743,76.2 129.743,77.2 D210.A 130.614,76.013 131.241,75.387 C211.1 C212.1 131.241,70.85 131.377,70.714 C213.1 131.377,69.054 133.096,67.335 136.144,67.335 137.16,68.351 137.16,70.612 135.65,72.122 J203.S3 135.65,74.436 136.906,75.692 136.906,79.494 J203.S5 v1(134.532,79.832) ; D202.A 135.5,57.836 ; D213.A 138,61.145 ; D201.A 137.96,46.18 D203.A 136,46.33 132.7,43.03 R101.1 128.681,38.4 127.7,39.624 ; J203.6 146.573,73.7 ; 149,61.145 138,61.145 ; D212.A 149,61.198 145.386,61.198 145.136,61.448 145.136,65.989 147.853,68.707 147.853,69.4 J203.S1 147.77,69.4 146.05,71.12 146.05,73.177 146.573,73.7 ; 94.742,69.475 95.555,69.475 95.58,69.5 96.449,69.5 ; 94.742,69.475 95.05,69.783 95.05,72.048 ; J204.6@95.936,45.375 95.936,45.06 96.52,44.475 97.42,44.475 ; J204.6@95.936,45.375 96.52,45.375 97.42,44.475 ; 96.449,69.5 96.037,69.088 96.037,64.846 99.025,61.859 99.568,61.859 ; 97.42,44.475 98.603,44.475 100.076,45.949 100.076,47.466 ; 99.568,61.859 98.069,60.36 D218.A 99.126,57.259 C214.1 103.429,57.259 103.67,57.5 C215.1 106.736,57.5 112.21,52.027 R206.1 120.091,52.027 129.209,61.145 C209.1@131,61.145 ; 99.739,47.803 100.076,47.466 ; 99.739,47.803 99.797,47.803 100.076,47.523 100.076,47.466 ; 110.5,43.604 110.5,44.425 109.899,45.026 v1(109.078,45.026) 110.5,43.604 ; v1@112.5,60.271 112.622,60.149 112.965,60.149 113.627,59.487 114.89,59.487 115.449,58.928 C210.1 116.637,57.5 116.809,57.328 119.151,57.328 119.824,58 C205.1 121,59.944 122.056,61 C206.1 123.5,59.944 124.944,58.5 C207.1 126,59.944 127.556,61.5 C208.1 C209.1 C209.1@131,61.145 ; 124.5,40.132 125.023,40.132 125.062,40.093 125.407,40.093 125.876,39.624 127.7,39.624 ; C209.1@131,61.145 131,59.995 133.159,57.836 135.5,57.836 ; 135.5,57.836 135.5,57.912 138,60.412 138,61.145
  L2 (GND) w0.5: v1(131.986,79.832) v1(134.532,79.832)
  L3 (GND) w0.2: v1@93.9,68 v1(93.95,68.05) ; v1@112.499,60.2 v1(112.5,60.199)
IMU_CP: C301.2 U301.20 | length 4.7
  L1 (Sig) w0.2: U301.20 107.01,81.71 107.783,81.71 109.119,80.374 v1(110,80.374)
  L1 (Sig) w0.5: v1(110,80.374) C301.2
IMU_INT: U201.45 U301.12 | length 15.7
  L1 (Sig) w0.2: U301.12 103.03,79.97 v1(103.5,79.5) ; v1(107.5,70) 108.5,69 U201.45
  L2 (GND) w0.2: v1(103.5,79.5) 103.5,74 v1(107.5,70)
IMU_REG: C302.2 U301.10 | length 4.5
  L1 (Sig) w0.2: v1(102,82) 102.21,82.21 102.99,82.21 U301.10
  L1 (Sig) w0.5: C302.2 99.618,82.786 v1(100.126,82.278)
  L2 (GND) w0.2: v1(100.126,82.278) 101.614,82.278 101.892,82 v1(102,82)
"LDO BYP": C103.2 U101.4 | length 2.2
  L1 (Sig) w0.5: C103.2 122.352,39.5 122.652,39.2 U101.4
MCU_I2C1_SCL: R202.1 U201.42 U301.23 | length 93.6
  L1 (Sig) w0.2: U301.23 109.25,83.25 v1(110.5,84.5) ; U201.42 110,69.5 v1(112,71.5)
  L1 (Sig) w0.5: v1(99.764,72.542) 100.602,71.704 R202.1
  L2 (GND) w0.2: v1(110.5,84.5) 117.421,84.5 118.838,85.917 147.402,85.917 148.7,84.62 148.7,83.61 147.399,82.31 142.584,82.31 142.465,82.429 128.742,82.429 121.978,75.665 120.645,75.665 120.445,75.465 120.344,75.465 120.044,75.165 115.665,75.165 v1(112,71.5)
MCU_I2C1_SDA: R203.1 U201.43 U301.24 | length 104.4
  L1 (Sig) w0.2: U301.24 107.75,83.75 v1(108.5,84.5) ; U201.43 109.5,70 110,70.5 v1(111,71.5)
  L1 (Sig) w0.5: v1(114.899,69.698) 115.101,69.698 116.198,68.6 R203.1
  L2 (GND) w0.2: 112.086,80.914 v1(108.5,84.5) 109.349,84.5 110.049,83.8 117.428,83.8 119.045,85.417 147.195,85.417 148.2,84.413 148.2,83.817 148.083,83.7 127.467,83.7 121.14,77.373 121.14,76.867 120.373,76.1 120.272,76.1 119.836,75.665 115.165,75.665 v1(111,71.5) 111,70.65 113.35,68.3 113.603,68.3 114.177,68.874 114.177,68.976 v1(114.899,69.698)
MCU_I2C2_SCL: R205.1 U201.21 U302.2 | length 26.8
  L1 (Sig) w0.2: v1(108.5,43) 108.975,43 109.725,42.25 U302.2 ; U201.21 111,59 111.5,58.5 111.5,58.9 v1(111.555,58.955) v1@111.663,58.955
  L1 (Sig) w0.5: R205.1 109.696,56.65 ; 109.696,56.65 v1(110.947,55.399) 110.297,55.399 109.696,56 109.696,56.65
  L2 (GND) w0.2: v1(108.5,43) 110.947,45.447 v1(110.947,55.399) 111.555,56.006 v1(111.555,58.955)
MCU_I2C2_SDA: R204.1 U201.46 U302.4 | length 4.7
  L1 (Sig) w0.2: v1(106.5,69.36) 106.577,69.283 106.784,69.283 108,68.067 U201.46
  L1 (Sig) w0.5: R204.1 105.323,71.662 106.204,72.542 v1(106.514,72.542)
MCU_LED: D204.POS U201.25 | length 6.4
  L1 (Sig) w0.2: U201.25 113.48,61.68 114.739,60.421 114.875,60.421 116.099,59.197 116.099,59.109 v1@116.708,58.5 ; v1@116.619,58.411 v1(116.659,58.371)
  L1 (Sig) w0.5: v1@116.619,58.411 116.708,58.5 D204.POS
MCU_LED_K: D204.NEG R206.2 | length 2.1
  L1 (Sig) w0.5: R206.2 D204.NEG
MCU_NRST: C203.2 R207.1 U201.7 | length 10.3
  L1 (Sig) w0.2: v1(105,64) 105.108,64 105.288,64.18 U201.7
  L1 (Sig) w0.5: C203.2 v1(101.905,64.145) ; v1(122.616,83.333) 122.635,83.314 123.568,83.314 123.982,82.9 R207.1
  L2 (GND) w0.2: v1(101.905,64.145) 102.75,63.3 104.3,63.3 v1(105,64)
MCU_OSC_IN: C201.2 U201.5 Y201.1 | length 16.2
  L1 (Sig) w0.2: v1(103.245,64.745) 103.68,65.18 U201.5
  L1 (Sig) w0.5: Y201.1 96,71.869 v1(96.241,71.628) ; v1(99.492,68.377) v1@99.5,68.385 ; v1(99.5,68.374) v1@99.5,68.385 ; C201.2 v1@99.5,68.385
  L2 (GND) w0.2: v1(99.492,68.377) 102.689,65.179 102.811,65.179 v1(103.245,64.745)
  L2 (GND) w0.5: v1(96.241,71.628) v1(99.492,68.377)
MCU_OSC_OUT: C202.2 R201.2 Y201.3 | length 20.8
  L1 (Sig) w0.5: C202.2 v1(91.664,73.637) ; Y201.3 94.1,74.865 ; v1(94.1,76.073) 94.1,74.865 ; v1(95.301,76.066) 94.1,74.865 ; v1(97,65.433) R201.2
  L3 (GND) w0.5: v1(95.301,76.066) 95.301,67.132 v1(97,65.433)
MCU_PA1: R218.1 U201.11 | length 13.5
  L1 (Sig) w0.2: v1(103.5,61.5) 104.18,62.18 U201.11
  L1 (Sig) w0.5: R218.1 103.014,52.879 v1(103.737,53.601)
  L2 (GND) w0.2: v1(103.5,61.5) 103.5,61.392 103.737,61.155 v1(103.737,53.601)
MCU_PA2: R219.1 U201.12 | length 16.1
  L1 (Sig) w0.2: v1(105,61.48) 105.088,61.48 105.288,61.68 U201.12
  L1 (Sig) w0.5: v1(102.399,50.237) 103.121,49.514 R219.1
  L2 (GND) w0.2: v1(102.399,50.237) 105,52.838 v1(105,61.48)
MCU_PA3: R220.1 U201.13 | length 22.5
  L1 (Sig) w0.2: R220.1 103.5,41.5 v1(104,41) ; v1(106,59.5) 106,60 U201.13
  L2 (GND) w0.2: v1(104,41) 104,49.25 106,51.25 v1(106,59.5)
MCU_PA4: R221.1 U201.14 | length 28.3
  L1 (Sig) w0.2: v1(107,59.5) 107.5,60 U201.14
  L1 (Sig) w0.5: R221.1 102.9,37.383 v1(103.622,36.66)
  L2 (GND) w0.2: v1(103.622,36.66) 107,40.038 v1(107,59.5)
MCU_SDIO_CK: R216.1 U201.28 | length 3.8
  L1 (Sig) w0.2: U201.28 115.32,63.18 v1(116.5,62)
MCU_SDIO_CMD: D211.K J203.3 R211.1 U201.16 | length 75
  L1 (Sig) w0.2: v1(108,59.5) 108.5,60 U201.16
  L1 (Sig) w0.5: R211.1 147.726,86.515 147.816,86.604 D211.K 147.142,84.725 v1(147.142,84.48) ; v1(146.914,76.987) v1@146.926,77 ; v1(146.923,77) v1@146.926,77 ; J203.3 v1@146.926,77
  L2 (GND) w0.2: v1(108,59.5) 109.3,60.8 109.3,75.517 112.207,78.424 112.759,78.424 118.835,84.5 132.61,84.5 132.63,84.48 v1(147.142,84.48)
  L3 (GND) w0.5: v1(146.914,76.987) 146.05,77.851 146.05,80.01 147.142,81.102 v1(147.142,84.48)
MCU_SDIO_D0: D213.K J203.7 R212.1 U201.40 | length 71.4
  L1 (Sig) w0.2: U201.40 111,68.5 v1(114,71.5)
  L1 (Sig) w0.5: R212.1 135.14,62.992 136.918,64.77 138,64.77 D213.K 138,66.218 v1(144.382,72.6) ; v1(146.914,72.6) v1(146.923,72.6) J203.7
  L2 (GND) w0.2: v1(114,71.5) 114.935,72.435 114.935,72.642 116.958,74.665 120.251,74.665 120.551,74.965 120.904,74.965 121.104,75.165 122.185,75.165 125.529,78.51 134.86,78.51 136.85,76.52 136.85,71.381 137.684,70.547 140.515,70.547 145.468,75.5 147.201,75.5 147.611,75.09 147.611,73.288 v1(146.923,72.6)
  L4 Sig w0.5: v1(144.382,72.6) v1(146.914,72.6)
MCU_SDIO_D1: D214.K J203.8 R213.1 U201.29 | length 16.5
  L1 (Sig) w0.5: R213.1 140.671,63.278 141.91,64.516 143.5,64.516 D214.K v1(143.5,66.218) ; J203.8 v1(149.777,71.5) v1(149.784,71.5)
  L2 (GND) w0.5: v1(143.5,66.218) 145.173,66.218 146.493,67.538 147.2,67.538 149.784,70.121 v1(149.784,71.5)
MCU_SDIO_D2: D215.K J203.1 R214.1 U201.30 | length 103.2
  L1 (Sig) w0.2: U201.30 113.82,64.18 114,64 116,64 v1(117,65)
  L1 (Sig) w0.5: R214.1 142.723,86.515 142.812,86.604 D215.K 143.736,86.231 142.189,84.684 v1(142.189,79.477) ; v1(146.914,79.477) 146.914,79.2 J203.1
  L2 (GND) w0.2: v1(117,65) 131.894,65 134.394,62.5 149.18,62.5 150.473,63.793 150.473,64 148.757,65.716 145.591,65.716 145.393,65.518 143.21,65.518 142.8,65.928 142.8,66.508 144.48,68.188 146.931,68.188 147.458,68.715 147.458,70.586 149.917,73.045 149.917,75.049 150.473,75.605 150.473,78.39 147.053,81.81 142.377,81.81 142.258,81.929 137.046,81.929 136.929,81.812 136.929,81.071 137.85,80.15 140.515,80.15 141.188,79.477 v1(142.189,79.477)
  L2 (GND) w0.5: v1(142.189,79.477) v1(146.914,79.477)
MCU_SDIO_D3: D216.K J203.2 R215.1 U201.41 | length 100.4
  L1 (Sig) w0.2: U201.41 110.5,69 v1(113,71.5)
  L1 (Sig) w0.5: R215.1 137.084,86.606 137.086,86.604 D216.K v1(138.282,81.229) ; J203.2 v1(149.773,78.1)
  L2 (GND) w0.2: v1(113,71.5) 113.7,70.8 114.304,70.8 116.004,72.5 120.292,72.5 121.947,74.155 122.589,74.155 125.944,77.51 135.153,77.51 136.35,76.313 136.35,69.974 138.809,67.515 138.809,67.373 142.464,63.718 148.835,63.718 149.09,63.973 149.09,64.676 148.55,65.216 145.798,65.216 145.6,65.018 143.003,65.018 142.3,65.721 142.3,66.715 144.273,68.688 146.724,68.688 146.958,68.922 146.958,71.491 148.111,72.643 148.111,75.212 149.073,76.174 149.073,77.4 v1(149.773,78.1)
  L2 (GND) w0.5: v1(138.282,81.229) 142.038,81.229 142.941,80.327 147.546,80.327 v1(149.773,78.1)
MCU_SWCLK: R209.1 U201.37 | length 28
  L1 (Sig) w0.2: U201.37 113.4,68.76 113.4,69.087 v1(113.477,69.163)
  L1 (Sig) w0.5: R209.1 127.848,76.806 127.852,76.81 v1(128.601,76.81)
  L2 (GND) w0.2: v1(113.477,69.163) 113.477,69.265 114.609,70.398 115.189,70.398 115.599,69.988 115.599,69.408 115.04,68.849 114.859,68.849 114.3,68.29 114.3,67.71 114.71,67.3 117.8,67.3 121.614,71.114 122.906,71.114 v1(128.601,76.81)
MCU_SWDIO: R208.1 U201.34 | length 15.4
  L1 (Sig) w0.2: U201.34 113.387,66.18 113.422,66.215 114.067,66.215 115,67.148 v1(115,68)
  L1 (Sig) w0.5: R208.1 120.668,73.6 120.874,73.806 121.165,73.806 121.56,73.411 122.155,73.411 v1(122.174,73.392)
  L2 (GND) w0.2: v1(115,68) 116.782,68 v1(122.174,73.392)
MCU_SWO: R210.1 U201.39 | length 2.1
  L1 (Sig) w0.5: v1(107.899,72.542) 107.955,72.486 R210.1
MCU_USB_D_N: D202.K J201.2 U201.32 | length 14
  L1 (Sig) w0.254: D202.K v1(135.5,54.852)
  L1 (Sig) w0.381: D202.K 135.5,53.58 135.144,53.224 135.144,50.692 135.432,50.405 139.393,50.405 140.039,51.05 J201.2
MCU_USB_D_P: D203.K J201.3 U201.33 | length 9.9
  L1 (Sig) w0.254: D203.K v1(136,52.532)
  L1 (Sig) w0.381: v1(136,52.532) 139.614,52.532 140.446,51.7 J201.3
MCU_VCAP: C210.2 U201.22 | length 6.6
  L1 (Sig) w0.2: U201.22 111.5,60 111.812,59.688 112.021,59.688 112.41,59.299 v1(112.5,59.299)
  L1 (Sig) w0.5: v1(113.163,56.374) C210.2
  L2 (GND) w0.2: v1(112.5,59.299) 113.163,58.635 v1(113.163,56.374)
NetR201_1: R201.1 U201.6 | length 10.5
  L1 (Sig) w0.2: v1(104,64) 104.7,64.7 105.338,64.7 105.358,64.68 U201.6
  L1 (Sig) w0.5: R201.1 98.4,65.511 99.122,64.788 v1(99.122,64.399)
  L2 (GND) w0.2: v1(99.122,64.399) 99.569,64.845 102.195,64.845 102.605,64.435 102.605,64.395 103,64 v1(104,64)
NRST: D206.K J202.1 R207.2 | length 5.4
  L1 (Sig) w0.5: J202.1 124,80.81 D206.K 125.146,81.32 125.326,81.5 R207.2
PWR_LED_K: D101.2 R101.2 | length 3.7
  L1 (Sig) w0.5: D101.2 R101.2
SD_CARD_DETECT: D217.K J203.9 R217.2 U201.26 | length 56.9
  L1 (Sig) w0.2: U201.26 114.82,62.18 v1(115,62)
  L1 (Sig) w0.5: D217.K 133.68,82.565 133.386,82.271 R217.2 133.386,79.248 134.046,78.588 135.65,78.588 J203.9 v1(135.65,76.023)
  L2 (GND) w0.2: v1(115,62) 115.077,61.923 115.587,61.923 121.427,56.083 121.593,56.083 121.71,56.2 121.71,60.654 118.164,64.2 116.81,64.2 116.3,64.71 116.3,65.29 117.81,66.8 126.427,66.8 135.519,75.892 135.519,75.981 v1@135.5,76
SD_CLK: D212.K J203.5 R216.2 | length 25.3
  L1 (Sig) w0.5: R216.2 148.367,63.883 149,64.516 ; v1(146.911,74.8) J203.5 ; v1(148.26,64.516) 149,64.516 ; D212.K 149,64.516
  L2 (GND) w0.5: v1(146.911,74.8) 145.542,73.431 145.542,72.136 145.009,71.603 143.764,71.603 141.65,69.489 141.65,65.452 142.734,64.368 145.869,64.368 146.017,64.516 v1(148.26,64.516)
SWCLK: D208.K J202.5 R209.2 | length 5.1
  L1 (Sig) w0.5: J202.5 122.707,78.27 122.937,78.5 D208.K 125.095,78.5 125.389,78.206 R209.2
SWDIO: D207.K J202.4 R208.2 | length 10.7
  L1 (Sig) w0.5: D207.K 117,76.759 118.516,76.759 ; J202.4 119.316,79.54 118.516,78.74 118.516,76.759 ; 118.516,76.759 118.516,75.356 118.872,75 R208.2 119.5,75.87 118.611,76.759 118.516,76.759
SWO: D209.K J202.6 R210.2 | length 14
  L1 (Sig) w0.5: R210.2 v1(110,75.227) ; v1(112.497,77.724) 112.5,77.721 v1(112.5,77.712) D209.K ; v1(119.558,78.27) J202.6
  L2 (GND) w0.5: v1(112.5,77.712) 115.736,77.712 116.294,78.27 v1(119.558,78.27)
  L3 (GND) w0.5: v1(110,75.227) v1(112.497,77.724)
pads on no net: J201.4 J201.S1 J201.S2 J201.S3 J201.S4 J201.S5 J201.S6 J202. J204.S1 J204.S2 U201.2 U201.3 U201.4 U201.10 U201.15 U201.17 U201.18 U201.20 U201.27 U201.31 U201.38 U301.2 U301.3 U301.4 U301.5 U301.6 U301.7 U301.14 U301.15 U301.16 U301.17 U301.19 U301.21 U301.22
copper on no net: | length 16.3
  L2 (GND) w0.2: 100.5,85.5 116.5,85.5 ; 123,84 123.22,83.78

## Polygon pours and split planes (outlines as drawn)
+3V3 on L4 Sig "+3V3_L04_P000" (none, remove dead copper, pour order 0): 89.5,93 151,93 151,34 89.5,34
GND on L1 (Sig) "GND_L01_P001" (solid, remove dead copper, pour order 1): 89.5,93 151,93 151,34 89.5,34

## Keep-outs
Keep-Out Layer:
  lines w0.254: 89.5,34 89.5,50 89.5,92.5 89.5,93 90,93 135,93 151,93 151,92.5 151,34 89.5,34

## Text inside footprints (layer, text, board x,y; h text height)
J201: Mechanical 13 "PCB EDGE" at 148.41,56.2 h0.41 r90